# Altium PCB PCB.PcbDoc
Units mil, origin at the board's own origin, x right, y up, seen from the top; angles counter-clockwise.
Board outline 11007 x 2140 mil, 2 copper layers (Top Layer, Bottom Layer); 69 components, 106 nets, 357 pads, 118 vias.
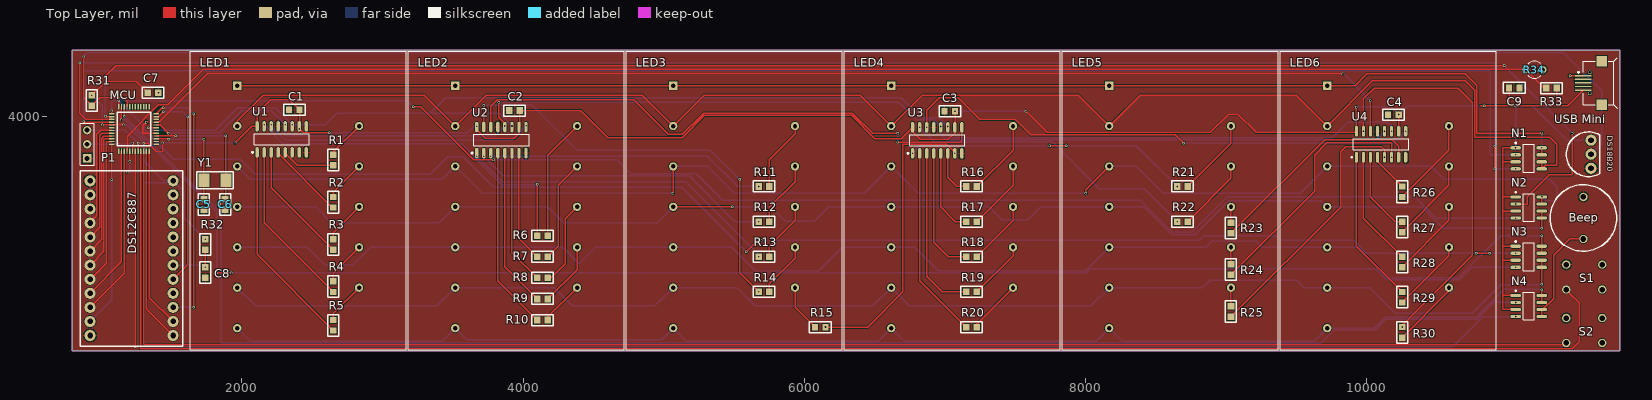
[diagram p0: Top Layer view]
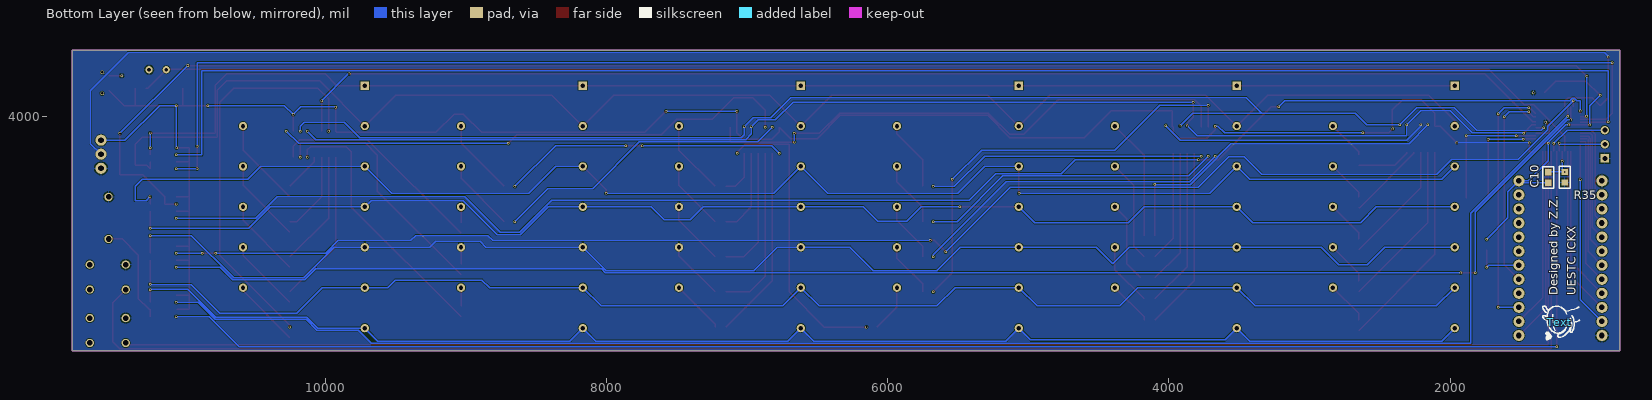
[diagram p1: Bottom Layer view, seen from below]

## Layer stack, top to bottom
Top Layer: signal copper 1.4
Dielectric: dielectric 12.6, FR-4, Dk 4.8
Bottom Layer: signal copper 1.4

## Board outline
792,4470 792,2330 11799,2330 11799,4470

## Design rules (kind name [scope] priority, off if disabled: settings)
Clearance [All] p1: gap=5
MinimumSolderMaskSliver [All] p1: minsoldermaskwidth=1
PolygonConnect [All] p1: connectstyle=Relief reliefconductorwidth=10 reliefentries=4 polygonreliefangle="90 Angle" airgapwidth=10
RoutingVias [All] p1: holewidth=11.81 width=17.81 viastyle="Through Hole" minholewidth=11.81 minwidth=17.81 maxholewidth=11.81 maxwidth=17.81
SilkscreenOverComponentPads [All] p1 off: minsilkscreentomaskgap=10
SolderMaskExpansion [All] p1: expansion=4
Width [All] p1: maxlimit=10 minlimit=10 preferedwidth=10
26 further rules are at their usual default settings.

## Components (designator, comment, footprint, x,y, rotation, side; value= is the part's Value field where it differs from the comment)
Beep "Bell" BEEP 11539,3276 r90 top
C1 "Cap" "0805 - DUPLICATE" 2410,4045 r180 top
C2 "Cap" "0805 - DUPLICATE" 3975,4040 r180 top
C3 "Cap" "0805 - DUPLICATE" 7071,4035 r180 top
C4 "Cap" "0805 - DUPLICATE" 10225,4010 r180 top
C5 "Cap" "0805 - DUPLICATE" 1730,3335 r90 top
C6 "Cap" "0805 - DUPLICATE" 1880,3335 r90 top
C7 "Cap" "0805 - DUPLICATE" 1331,4166 r0 top
C8 "Cap" "0805 - DUPLICATE" 1740,2850 r90 top
C9 "Cap" "0805 - DUPLICATE" 11010,4200 r0 top
C10 "Cap" "0805 - duplicate" 1302,3527.2 r90 bottom
DS12C887 "DS12C887" TIMER 920,3540 r0 top
DS18B20 "Header 3" TO-92 11593,3729 r90 top
LED1 "LED Matrix" "LED-MATRIX 5*7" 2400,3400 r0 top
LED2 "LED Matrix" "LED-MATRIX 5*7" 3950,3400 r0 top
LED3 "LED Matrix" "LED-MATRIX 5*7" 5500,3400 r0 top
LED4 "LED Matrix" "LED-MATRIX 5*7" 7050,3400 r0 top
LED5 "LED Matrix" "LED-MATRIX 5*7" 8600,3400 r0 top
LED6 "LED Matrix" "LED-MATRIX 5*7" 10150,3400 r0 top
MCU "STC12C5A60S2-35I-LQFP48" MCU 1370,3770 r90 top
N1 "4953" SO8_L 11150,3700 r0 top
N2 "4953" SO8_L 11150,3350 r0 top
N3 "4953" SO8_L 11150,3000 r0 top
N4 "4953" SO8_L 11150,2650 r0 top
P1 "Header 3" HDR1X3 900,3700 r90 top
R1 "Res" 0805 2650,3650 r90 top
R2 "Res" 0805 2650,3350 r90 top
R3 "Res" 0805 2650,3050 r90 top
R4 "Res" 0805 2650,2750 r90 top
R5 "Res" 0805 2650,2475 r90 top
R6 "Res" 0805 4100,3150 r0 top
R7 "Res" 0805 4100,3000 r0 top
R8 "Res" 0805 4100,2850 r0 top
R9 "Res" 0805 4100,2700 r0 top
R10 "Res" 0805 4100,2550 r0 top
R11 "Res" 0805 5675,3500 r0 top
R12 "Res" 0805 5675,3250 r0 top
R13 "Res" 0805 5675,3000 r0 top
R14 "Res" 0805 5675,2750 r0 top
R15 "Res" 0805 6150,2500 r180 top
R16 "Res" 0805 7150,3500 r0 top
R17 "Res" 0805 7150,3250 r0 top
R18 "Res" 0805 7150,3000 r0 top
R19 "Res" 0805 7150,2750 r0 top
R20 "Res" 0805 7150,2500 r0 top
R21 "Res" 0805 8650,3500 r0 top
R22 "Res" 0805 8650,3250 r0 top
R23 "Res" 0805 9033,3167 r90 top
R24 "Res" 0805 9033,2872 r90 top
R25 "Res" 0805 9033,2574 r90 top
R26 "Res" 0805 10250,3500 r270 top
R27 "Res" 0805 10250,3250 r270 top
R28 "Res" 0805 10250,3000 r270 top
R29 "Res" 0805 10250,2750 r270 top
R30 "Res" 0805 10250,2500 r270 top
R31 "4.7k" 0805 933,4073 r90 top
R32 "10K" 0805 1740,3050 r90 top
R33 "68K" 0805 11350,4200 r180 top
R34 "Res" R38 11190,4330 r90 top
R35 "Res" 0805 1185,3603 r270 bottom
S1 "SW-PB" BUTTON 11417,2767 r0 top
S2 "SW-PB" BUTTON 11417,2387 r0 top
Text "Text" TUSIJI_8 1220,2535 r90 bottom
U1 "74HC595" SO-16_L 2283,3835 r90 top
U2 "74HC595" SO-16_L 3845,3830 r90 top
U3 "74HC595" SO-16_L 6944,3828 r90 top
U4 "74HC595" SO-16_L 10100,3800 r90 top
"USB Mini" "" MICRO_USB 11754,4236 r0 top
Y1 "XTAL" 5023 1730,3545 r0 top

## Footprints (in the part's own frame and the unit in brackets; to place one, negate y for a bottom-side part, rotate by r counter-clockwise, add the part's x,y. Pads: shape width x height; smd on the part's side, far side on the other; paste and mask are expansions set on the pad)
0805 [mm]
  rect 1.14x1.2 smd: 0(0,0) 1(1.9,0)
  silkscreen extent -1,-0.99 2.9,1
"0805 - DUPLICATE" [mm]
  rect 1.14x1.2 smd: 1(0,0) 2(1.9,0)
  silkscreen extent -1,-0.99 2.9,1
"0805 - duplicate" [mm]
  rect 1.14x1.2 smd: 1(0,0) 2(1.9,0)
  silkscreen extent -1,-0.99 2.9,1
5023 [mm]
  rect 2x2.4 smd: 1(0,0) 2(4,0)
  silkscreen extent -1.32,-1.52 5.33,1.52
BEEP [mm]
  round 1.5 hole 1: 0(-3.8,0) 1(3.8,0)
  silkscreen extent -6,-6 6,6
BUTTON [mm]
  round 1.5 hole 1: 0(0,0) 1(0,4.5) 2(6.5,4.5) 3(6.5,0)
HDR1X3 [mm] "Connector; Header; 3 Position"
  rect 1.5x1.5 hole 0.9: 1(0,0)
  round 1.5 hole 0.9: 2(2.54,0) 3(5.08,0)
  silkscreen extent -1.27,-1.27 6.35,1.27
"LED-MATRIX 5*7" [mm] "LED"
  rect 1.5x1.5 hole 0.8: 1(-11,20.75)
  round 1.5 hole 0.8: 2(-11,13.45) 3(-11,6.15) 4(-11,-1.15) 5(-11,-8.45) 6(-11,-15.75) 7(-11,-23.05) 8(11,13.45) 9(11,6.15) 10(11,-1.15) 11(11,-8.45) 12(11,-15.75)
  silkscreen extent -19.5,-27 19.5,27, body extent -19.5,-27 19.5,27, height 10
MCU [mm]
  rect 1x0.25 smd: 1(-0.5,6.25) 2(-0.5,5.75) 3(-0.5,5.25) 4(-0.5,4.75) 5(-0.5,4.25) 6(-0.5,3.75) 7(-0.5,3.25) 8(-0.5,2.75) 9(-0.5,2.25) 10(-0.5,1.75) 11(-0.5,1.25) 12(-0.5,0.75) 25(7.5,0.75) 26(7.5,1.25) 27(7.5,1.75) 28(7.5,2.25) 29(7.5,2.75) 30(7.5,3.25) 31(7.5,3.75) 32(7.5,4.25) 33(7.5,4.75) 34(7.5,5.25) 35(7.5,5.75) 36(7.5,6.25)
  rect 0.25x1 smd: 13(0.75,-0.5) 14(1.25,-0.5) 15(1.75,-0.5) 16(2.25,-0.5) 17(2.75,-0.5) 18(3.25,-0.5) 19(3.75,-0.5) 20(4.25,-0.5) 21(4.75,-0.5) 22(5.25,-0.5) 23(5.75,-0.5) 24(6.25,-0.5) 37(6.25,7.5) 38(5.75,7.5) 39(5.25,7.5) 40(4.75,7.5) 41(4.25,7.5) 42(3.75,7.5) 43(3.25,7.5) 44(2.75,7.5) 45(2.25,7.5) 46(1.75,7.5) 47(1.25,7.5) 48(0.75,7.5)
  silkscreen extent 0.5,0.5 6.5,6.5
MICRO_USB [mm]
  rect 3x0.25 smd: 1(-5.508,-1.3) 2(-5.508,-0.65) 3(-5.508,0) 4(-5.508,0.65) 5(-5.508,1.3)
  round 0.635 hole 0.457 unplated: MH1(-4.3,1.9) MH2(-4.3,-1.9)
  rect 1.9x1.9 smd: ""(-2.15,-3.95) ""(-2.15,3.95)
  silkscreen extent -6.47,-4.57 0.63,4.57
R38 [mm] "Crystal, Thru-Hole; 2 Leads; Body 3.1 x 8.2 mm (Dia.xH)"
  round 1.3 hole 0.7: 1(0,1.55) 2(0,-1.55)
  silkscreen extent -1.55,-1.19 1.55,1.17
SO8_L [mm] "SOIC, 8-Leads, Body 4.9x3.9mm, Pitch 1.27mm, IPC High Density"
  oval 1.9x0.6 smd: 1(-2.35,1.905) 2(-2.35,0.635) 3(-2.35,-0.635) 4(-2.35,-1.905) 5(2.35,-1.905) 6(2.35,-0.635) 7(2.35,0.635) 8(2.35,1.905)
  silkscreen extent -2.47,-2.5 1,2.88, body extent -2,-2.5 2,2.5, height 1.75
SO-16_L [mm] "SOIC, 16-Leads, Body 9.9x3.9mm, Pitch 1.27mm, IPC High Density"
  oval 1.9x0.6 smd: 1(-2.35,4.445) 2(-2.35,3.175) 3(-2.35,1.905) 4(-2.35,0.635) 5(-2.35,-0.635) 6(-2.35,-1.905) 7(-2.35,-3.175) 8(-2.35,-4.445) 9(2.35,-4.445) 10(2.35,-3.175) 11(2.35,-1.905) 12(2.35,-0.635) 13(2.35,0.635) 14(2.35,1.905) 15(2.35,3.175) 16(2.35,4.445)
  silkscreen extent -2.47,-5 1,5.42, body extent -2,-5 2,5, height 1.75
TIMER [mm]
  round 2 hole 1: 1(0,0) 2(0,-2.54) 3(0,-5.08) 4(0,-7.62) 5(0,-10.16) 6(0,-12.7) 7(0,-15.24) 8(0,-17.78) 9(0,-20.32) 10(0,-22.86) 11(0,-25.4) 12(0,-27.94) 13(15,-27.94) 14(15,-25.4) 15(15,-22.86) 16(15,-20.32) 17(15,-17.78) 18(15,-15.24) 19(15,-12.7) 20(15,-10.16) 21(15,-7.62) 22(15,-5.08) 23(15,-2.54) 24(15,0)
  silkscreen extent -1.78,-29.84 16.76,1.78
TO-92 [mm]
  round 2 hole 1: 1(-2.54,0) 2(0,0) 3(2.54,0)
  silkscreen extent -4.04,-1.57 4.04,4.44
TUSIJI_8 [mil] "TSJ"
  silkscreen extent -128,-142 115,122

## Part data
Beep: "Electrical Bell"
C1 C2 C3 C4 C5 C6 C7 C8 C9 C10: "Capacitor"
DS18B20 P1: "Header, 3-Pin"
LED1 LED2 LED3 LED4 LED5 LED6: library part "LED-Matrix 5*7"
R31 R32 R33: library part Res
S1 S2: "Switch"
"USB Mini": library part USB
Y1: "Crystal Oscillator"

## Via types
v1: diameter 17.81, hole 11.81, Top Layer to Bottom Layer, 118 vias

## Nets (pads, with @x,y where several pads share a name; then routed paths per layer and width w, separated by ;. In a path a pad name is that pad's centre, name@x,y a point inside that pad or via, vN(x,y) a via of type N, cw(c..) or ccw(c..) an arc to the next point about the centre after c; other vN are vias at no path point)
AD: MCU.4 R33.1 R34.1 | length 10447.5
  Top Layer w10: MCU.4 1182.99,3856.99 1406,4080 1474,4080 1726,4332 R34.1@11126.98,4332 ; R34.1 11258.98,4200 R33.1
AD0: DS12C887.4 MCU.43 | length 767
  Top Layer w10: DS12C887.4 920,3241.26 969.37,3290.63 969.37,3869.37 997.95,3897.95 MCU.43
AD1: DS12C887.5 MCU.44 | length 844.2
  Top Layer w10: DS12C887.5 989.21,3209.21 989.21,3864.21 1003.27,3878.27 MCU.44
AD2: DS12C887.6 MCU.45 | length 919.8
  Top Layer w10: DS12C887.6 1004.21,3124.21 1004.21,3840.43 1011.42,3847.63 1011.42,3858.58 MCU.45
AD3: DS12C887.7 MCU.46 | length 992.8
  Top Layer w10: DS12C887.7 1019.21,3039.21 1019.21,3834.21 1023.9,3838.9 MCU.46
AD4: DS12C887.8 MCU.47 | length 1067
  Top Layer w10: DS12C887.8 1034.21,2954.21 1034.21,3819.21 MCU.47
AD5: DS12C887.9 MCU.2 | length 1102.9
  Top Layer w10: DS12C887.9 1143.62,2963.62 MCU.2
AD6: DS12C887.10 MCU.3 | length 1211.1
  Top Layer w10: DS12C887.10 1163.31,2883.31 MCU.3
AD7: DS12C887.11 MCU.48 | length 1322.5
  Top Layer w10: v1(1074.72,3549.28) MCU.48
  Bottom Layer w10: DS12C887.11 1075,2695 v1@1075,3548
AS: DS12C887.14 MCU.12 | length 1280.8
  Top Layer w10: MCU.12 1340.47,2710.08 DS12C887.14
BEEP: MCU.7 N4.4 | length 11293.4
  Top Layer w10: v1(1242.05,2361.05) MCU.7
  Bottom Layer w10: v1(1242.05,2361.05) 10610.43,2361 10824.43,2575 v1(11057.48,2575)
BEEPOUT: Beep.0 N4.5 N4.6 | length 734
  Top Layer w10: N4.5 N4.6 11248.96,2625 11327,2703.04 11327,3010 11443.39,3126.39 Beep.0
BUTTON1: MCU.9 S1.0 | length 12063.1
  Top Layer w10: MCU.9 1281.42,2345.58 11458.58,2345.58 11510,2397 11510,2674 S1.0
BUTTON2: MCU.10 S2.0 | length 11494.3
  Top Layer w10: 1301.1,2376 1301.47,2375.63 11405.63,2375.63 S2.0 ; 1301.1,2376.73 MCU.10
CS: DS12C887.13 MCU.11 | length 1388.9
  Top Layer w10: MCU.11 1320.79,2629.76 DS12C887.13
DATA: MCU.21 U4.14 | length 9073.6
  Top Layer w10: MCU.21 1394.45,3961.77 1413.51,3961.77 1751.74,4300 v1(9829,4300) ; U4.14 v1(10025,4110)
  Bottom Layer w10: v1(9829,4300) 9835,4300 v1(10025,4110)
DS: DS12C887.17 MCU.23 | length 1452.6
  Top Layer w10: MCU.23 1408.75,3996.38 1440,4027.63 v1(1440,4030) ; DS12C887.17 1614,2943.45 v1(1614,3996)
  Bottom Layer w10: v1(1440,4030) 1580,4030 v1(1614,3996)
DS18B20: DS18B20.2 MCU.33 R31.0 | length 12098.4
  Top Layer w10: v1(875,4421) 875,4131 R31.0 990,4130 1159,4130 1182.99,4106.01 MCU.33
  Bottom Layer w10: v1@873,4423 900,4450 11400,4450 11669,4181 11669,3805 DS18B20.2
GND: "USB Mini.4" "USB Mini.5" Beep.1 C1.2 C2.2 C3.2 C4.2 C5.1 C6.1 C7.2 C8.1 C9.2 DS12C887.1 DS12C887.12 DS18B20.1 MCU.17 P1.1 R34.2 R35.1 S1.1 S2.1 U1.8 U1.13 U2.8 U2.13 U3.8 U3.13 U4.8 U4.13 | length 275.4
  Top Layer w10: v1(1321,3957) 1295.73,3931.73 1295.73,3878.27 MCU.17 ; v1(11445,4287) 11445.18,4287.18 11537.15,4287.18
  other v1: 1407,4166
H1: MCU.40 N1.2 | length 11342.5
  Top Layer w10: v1@875,3957 MCU.40@1073,3957
  Bottom Layer w10: v1(875,3959) 875,4323 10875,4323 10875,3725 v1(11057.48,3725)
H1OUT: LED1.1 LED2.1 LED3.1 LED4.1 LED5.1 LED6.1 N1.7 N1.8 | length 9839.6
  Top Layer w10: LED1.1 9916.93,4216.93 10000,4300 10700,4300 10780,4220 10780,3880 v1(11243,3880) ; N1.7 v1(11242.52,3775)
  Bottom Layer w10: v1(11242.52,3775) v1@11242.52,3881
H2: MCU.39 N1.4 | length 11568.7
  Top Layer w10: v1(848,4379) 848,4019 890.31,3976.69 MCU.39 ; v1(10910,3625) v1(10910,3787)
  Bottom Layer w10: v1@847,4379 10910,4379 v1(10910,3787) ; v1(10910,3625) v1(11057.48,3625)
H2OUT: LED1.2 LED2.2 LED3.2 LED4.2 LED5.2 LED6.2 N1.5 N1.6 | length 11151.4
  Top Layer w10: LED1.2 1966.93,3966.93 2150,4150 3296.46,4150 LED2.2 3737.4,4150 4846.46,4150 LED3.2 5287.4,4150 6396.46,4150 LED4.2 6837.4,4150 7946.46,4150 LED5.2 8387.4,4150 9496.46,4150 LED6.2 10037.4,4250 10700,4250 10765,4185 10765,3850 11300,3850 11350,3800 11350,3650 11267.52,3650 N1.5 N1.6
H3: MCU.38 N2.2 | length 11796.7
  Top Layer w10: v1(1027,4284) 1103,4360 v1(10975,4360) ; v1@1036.38,3996.38 MCU.38 ; v1(11057.48,3375) 11139,3375 11139,3427 11296,3584 11458,3584 v1(11458,3877)
  Bottom Layer w10: v1(1027,4284) 1027,4003 v1(1030,4000) ; v1(10975,4360) v1(11458,3877)
H3OUT: LED1.3 LED2.3 LED3.3 LED4.3 LED5.3 LED6.3 N2.7 N2.8 | length 10544.8
  Top Layer w10: v1(5065,3451) 5066.93,3452.93 LED3.3 ; v1(8000,3450) 8000,3475.2 LED5.3 ; N2.7 N2.8@11242.52,3423.52
  Bottom Layer w10: LED1.3 2059.06,3550 3424.8,3550 LED2.3 3709.06,3450 5064,3450 v1(5065,3451) ; LED3.3 5307.87,3642.13 5500,3450 6424.8,3450 LED4.3 6809.06,3450 v1(8000,3450) ; LED5.3 8357.87,3642.13 8550,3450 9524.8,3450 LED6.3 10457.87,3642.13 10550,3550 11300,3550 11350,3500 11350,3400 11271,3400 v1(11245,3426)
H4: MCU.37 N2.4 | length 10648.2
  Top Layer w10: MCU.37 v1@1074.72,4036.28 ; v1(3218,4067) 3271.27,4067 3648.19,3690.08 v1@3787.92,3690.08
  Bottom Layer w10: v1(1074,4037) 1074,4110 1098.26,4110 1116.17,4127.91 1131.83,4127.91 1142.91,4116.83 1142.91,4111.31 1144.21,4110 3175,4110 v1(3218,4067) ; v1(3789,3689) 4667,3689 4766,3590 5231.23,3590 5418.23,3403 8387.21,3403 8616.61,3173.61 8753.61,3173.61 9006,3426 10341.21,3426 10492.21,3275 v1(11057.48,3275)
H4OUT: LED1.4 LED2.4 LED3.4 LED4.4 LED5.4 LED6.4 N2.5 N2.6 | length 10010
  Top Layer w10: LED3.4 v1(5487.72,3354.72) ; v1@11242.52,3202.52 N2.5 N2.6
  Bottom Layer w10: LED1.4 2523.28,3354.72 2637,3241 3403.21,3241 LED2.4 4175.28,3354.72 4289,3241 4953.21,3241 LED3.4 ; v1(5487.72,3354.72) 5761.28,3354.72 5862,3254 6071,3254 6171.72,3354.72 7309.72,3354.72 7402.45,3262 7589,3262 7681.72,3354.72 8414.28,3354.72 8611,3158 8774,3158 9016,3400 9671.65,3400 LED6.4 10391.28,3354.72 10544,3202 v1(11242,3202)
H5: MCU.36 N3.2 | length 10639.3
  Top Layer w10: MCU.36 v1@1123.94,4108.94 ; v1(5587,3036) 5667,3116 v1(5696,3116) ; v1(10778,3025) v1(10873,3025)
  Bottom Layer w10: v1(1124,4109) 1304,3929 1304,3904.57 1514.57,3694 1987,3694 2094,3587 3338,3587 3463,3712 3574,3712 3791,3495 5128,3495 v1(5587,3036) ; v1(5696,3116) 8808,3116 8843,3151 9354,3151 9389,3116 9905.21,3116 9996.21,3025 v1(10778,3025) ; v1(10873,3025) v1(11057.48,3025)
H5OUT: LED1.5 LED2.5 LED3.5 LED4.5 LED5.5 LED6.5 N3.7 N3.8 | length 10126.6
  Top Layer w10: N3.7@11242,3025.52 v1(11242,3150)
  Bottom Layer w10: LED1.5 2464.68,3067.32 2590,2942 2792,2942 2917.32,3067.32 LED2.5 4282.68,3067.32 4400,2950 4517.32,3067.32 LED3.5 5482.68,3067.32 5650,2900 6100,2900 6267.32,3067.32 LED4.5 6782.68,3067.32 6950,2900 7999.61,2900 LED5.5 8856.32,3067.32 8898,3109 9214,3109 9255.68,3067.32 LED6.5 9932.68,3067.32 10150,2850 10650,2850 10950,3150 v1(11242,3150)
H6: MCU.35 N3.4 | length 10791.3
  Top Layer w10: v1(1143.62,3972.62) MCU.35 ; v1@1821,2885 v1(1925,2885)
  Bottom Layer w10: v1(1143.62,3972.62) 1167.16,3972.62 1821,3318.79 v1(1821,2886) ; v1(1925,2885) 8005.82,2885 8033.82,2913 10065.79,2913 10143.79,2835 10656.21,2835 10746.21,2925 v1(11057.48,2925)
H6OUT: LED1.6 LED2.6 LED3.6 LED4.6 LED5.6 LED6.6 N3.5 N3.6 | length 10081.2
  Top Layer w10: v1(11242.52,2803.52) N3.5 N3.6
  Bottom Layer w10: LED1.6 2096.85,2650 3387.01,2650 LED2.6 4220.08,2779.92 4350,2650 4937.01,2650 LED3.6 5520.08,2779.92 5650,2650 6487.01,2650 LED4.6 6746.85,2650 8037.01,2650 LED5.6 8829.92,2779.92 8884,2834 9500.96,2834 9555.04,2779.92 10020.08,2779.92 10200,2600 10750,2600 10950,2800 11239,2800 v1(11242.52,2803.52)
H7: MCU.34 N4.2 | length 11291
  Top Layer w10: v1@1163.31,3998.31 MCU.34
  Bottom Layer w10: v1(1163,3998) 1852,3309 1852,2385 9670,2385 9762.52,2477.52 10058.73,2477.52 10135.21,2554 10782.21,2554 10903.21,2675 v1(11057.48,2675)
H7OUT: LED1.7 LED2.7 LED3.7 LED4.7 LED5.7 LED6.7 N4.7 N4.8 | length 9848.9
  Top Layer w10: N4.7 N4.8 v1(11242.52,2766.48)
  Bottom Layer w10: LED1.7 2059.45,2400 3424.41,2400 LED2.7 3600,2409.45 4983.86,2409.45 LED3.7 5159.45,2400 6524.41,2400 LED4.7 6709.45,2400 8074.41,2400 LED5.7 8259.45,2400 9624.41,2400 LED6.7 10052.52,2492.52 10129,2569 10776,2569 10977,2770 11234,2770
NetC5_2: C5.2 MCU.15 Y1.1 | length 767.1
  Top Layer w10: MCU.15 1476.1,3838.9 v1(1480,3835) ; C5.2 Y1.1 v1(1730,3835)
  Bottom Layer w10: v1(1480,3835) v1(1730,3835)
NetC6_2: C6.2 MCU.16 Y1.2 | length 939.6
  Top Layer w10: MCU.16 1390.01,3858.91 v1@1528.91,3858.91 ; C6.2@1885,3414.8 v1(1885,3860)
  Bottom Layer w10: v1(1530,3860) v1(1885,3860)
NetC8_2: C8.2 DS12C887.18 R32.0 | length 360.9
  Top Layer w10: v1(1740,2924.8) R32.0
  Bottom Layer w10: DS12C887.18 1724.8,2940 v1(1740,2924.8)
NetLED1_8: LED1.8 R1.1 | length 280.6
  Top Layer w10: R1.1 2650,3746.46 LED1.8
NetLED1_9: LED1.9 R2.1 | length 293.2
  Top Layer w10: R2.1 2650,3459.06 LED1.9
NetLED1_10: LED1.10 R3.1 | length 305.8
  Top Layer w10: R3.1 2650,3171.65 LED1.10
NetLED1_11: LED1.11 R4.1 | length 318.3
  Top Layer w10: R4.1 2650,2884.25 LED1.11
NetLED1_12: LED1.12 R5.1 | length 305.9
  Top Layer w10: R5.1 2650,2596.85 LED1.12
NetLED2_8: LED2.8 R6.1 | length 865.8
  Top Layer w10: R6.1 4174.8,3721.26 LED2.8
NetLED2_9: LED2.9 R7.1 | length 728.4
  Top Layer w10: R7.1 4250,3075.2 4250,3509.06 LED2.9
NetLED2_10: LED2.10 R8.1 | length 580.6
  Top Layer w10: 4200,2850 4300,2950 4300,3271.65 LED2.10
NetLED2_11: LED2.11 R9.1 | length 453.6
  Top Layer w10: R9.1 4383.07,2908.27 LED2.11
NetLED2_12: LED2.12 R10.1 | length 316.2
  Top Layer w10: R10.1 4174.8,2571.66 LED2.12
NetLED3_8: LED3.8 R11.1 | length 505.4
  Top Layer w10: R11.1 5749.8,3689.8 5933.07,3873.07 LED3.8
NetLED3_9: LED3.9 R12.1 | length 468
  Top Layer w10: R12.1 5749.8,3351.8 5933.07,3535.07 LED3.9
NetLED3_10: LED3.10 R13.1 | length 430.6
  Top Layer w10: R13.1 5749.8,3074.8 5933.07,3258.07 LED3.10
NetLED3_11: LED3.11 R14.1 | length 393.2
  Top Layer w10: R14.1 5749.8,2806.66 5933.07,2989.93 LED3.11
NetLED3_12: LED3.12 R15.1 | length 338.8
  Top Layer w10: LED3.12 5933.07,2642.13 R15.1
NetLED4_8: LED4.8 R16.1 | length 536.5
  Top Layer w10: R16.1 7483.07,3758.27 LED4.8
NetLED4_9: LED4.9 R17.1 | length 499.1
  Top Layer w10: R17.1 7483.07,3508.27 LED4.9
NetLED4_10: LED4.10 R18.1 | length 461.7
  Top Layer w10: R18.1 7483.07,3258.27 LED4.10
NetLED4_11: LED4.11 R19.1 | length 424.3
  Top Layer w10: R19.1 7483.07,3008.27 LED4.11
NetLED4_12: LED4.12 R20.1 | length 386.9
  Top Layer w10: R20.1 7224.8,2521.66 LED4.12
NetLED5_8: LED5.8 R21.1 | length 557.2
  Top Layer w10: R21.1 9033.07,3808.27 LED5.8
NetLED5_9: LED5.9 R22.1 | length 519.8
  Top Layer w10: R22.1 9033.07,3558.27 LED5.9
NetLED5_10: LED5.10 R23.1 | length 112.9
  Top Layer w10: R23.1 9033.07,3241.87 LED5.10
NetLED5_11: LED5.11 R24.1 | length 120.5
  Top Layer w10: R24.1 9033.07,2946.87 LED5.11
NetLED5_12: LED5.12 R25.1 | length 131
  Top Layer w10: R25.1@9033.07,2648.87 LED5.12
NetLED6_8: LED6.8 R26.1 | length 642.3
  Top Layer w10: R26.1 10583.07,3758.27 LED6.8
NetLED6_9: LED6.9 R27.1 | length 604.9
  Top Layer w10: R27.1 10583.07,3508.27 LED6.9
NetLED6_10: LED6.10 R28.1 | length 567.5
  Top Layer w10: R28.1 10583.07,3258.27 LED6.10
NetLED6_11: LED6.11 R29.1 | length 530.1
  Top Layer w10: R29.1 10583.07,3008.27 LED6.11
NetLED6_12: LED6.12 R30.1 | length 492.7
  Top Layer w10: R30.1 10583.07,2758.27 LED6.12
NetR1_0: R1.0 U1.5 | length 384.1
  Top Layer w10: U1.5 2308,3736.04 2394.04,3650 R1.0
NetR2_0: R2.0 U1.4 | length 558.3
  Top Layer w10: U1.4 2258,3736.04 2644.04,3350 R2.0
NetR3_0: R3.0 U1.3 | length 875.6
  Top Layer w10: U1.3 2208,3492 R3.0
NetR4_0: R4.0 U1.2 | length 1196.3
  Top Layer w10: U1.2 2158,3242 R4.0
NetR5_0: R5.0 U1.1 | length 1492
  Top Layer w10: U1.1 2108,3017 R5.0
NetR6_0: R6.0 U1.15 | length 2480
  Top Layer w10: R6.0 v1@4100,3511
  Bottom Layer w10: v1(2158,3939) 2292,3805 3558.79,3805 3651.09,3712.69 3651.09,3707.17 3846.37,3511.89 v1@4096.89,3511.89
  other v1: 4100,3515
NetR7_0: R7.0 U2.7 | length 791.3
  Top Layer w10: U2.7 3970,3130 R7.0
NetR8_0: R8.0 U2.6 | length 962
  Top Layer w10: U2.6 3920,3030 R8.0
NetR9_0: R9.0 U2.5 | length 1132.7
  Top Layer w10: U2.5 3870,2930 R9.0
NetR10_0: R10.0 U2.4 | length 1303.5
  Top Layer w10: U2.4 3820,2830 R10.0
NetR11_0: R11.0 U2.3 | length 1994.1
  Bottom Layer w10: v1(3770,3715) 5310,3715 5525,3500 v1(5675,3500)
NetR12_0: R12.0 U2.2 | length 2147.6
  Bottom Layer w10: v1(3720,3715) 3860,3575 5180,3575 5505,3250 v1(5675,3250)
NetR13_0: R13.0 U2.1 | length 2309.9
  Bottom Layer w10: v1(3670,3715) 3850,3535 5155,3535 5675,3015 v1(5675,3000)
NetR14_0: R14.0 U2.15 | length 3047.3
  Top Layer w10: U2.15 v1(3720,4076) ; v1(5539,3551) 5539,2886 v1(5675,2750)
  Bottom Layer w10: v1(3720,4076) 4066,4076 4383,3759 5331,3759 v1(5539,3551)
NetR15_0: R15.0 U3.7 | length 2103
  Top Layer w10: v1(6150,2500) 6450,2500 6700,2750 6700,3800 7010.92,3800 7069,3741.92 v1(7069,3735.48)
NetR16_0: R16.0 U3.6 | length 328.4
  Top Layer w10: U3.6 7019,3565 7084,3500 R16.0
NetR17_0: R17.0 U3.5 | length 605.6
  Top Layer w10: U3.5 6969,3354 7073,3250 R17.0
NetR18_0: R18.0 U3.4 | length 905.6
  Top Layer w10: U3.4 6919,3104 7023,3000 R18.0
NetR19_0: R19.0 U3.3 | length 1200.9
  Top Layer w10: U3.3 6869,2862 6981,2750 R19.0
NetR20_0: R20.0 U3.2 | length 1372.6
  Top Layer w10: U3.2 6819,2831 R20.0
NetR21_0: R21.0 U3.1 | length 2030
  Top Layer w10: v1(6769,3735.48) U3.1@6769,3741.92 ; v1(7743,3789) v1(7862,3789)
  Bottom Layer w10: v1(6769,3735.48) 6823,3789.48 v1@7743.52,3789.48 ; v1(7862,3789) 8361,3789 v1(8650,3500)
NetR22_0: R22.0 U3.15 | length 2108.7
  Bottom Layer w10: v1(6819,3920.52) 6922.52,3817 7764,3817 8096,3485 8415,3485 v1(8650,3250)
NetR23_0: R23.0 U4.7 | length 1565.9
  Top Layer w10: R23.0 9699,3833 10178,3833 10225,3786 U4.7
NetR24_0: R24.0 U4.6 | length 1778.1
  Top Layer w10: R24.0 9627,3466 9627,3723 9713,3809 10168,3809 10175,3802 v1(10175,3707.48)
NetR25_0: R25.0 U4.5 | length 1885.6
  Top Layer w10: R25.0 9812,3353 9812,3746 9849,3783 10103,3783 10125,3761 v1(10125,3707.48)
NetR26_0: R26.0 U4.4 | length 280
  Top Layer w10: U4.4 10075,3675 R26.0
NetR27_0: R27.0 U4.3 | length 580
  Top Layer w10: U4.3 10025,3425 10200,3250 R27.0
NetR28_0: R28.0 U4.2 | length 821.4
  Top Layer w10: U4.2 9975,3275 R28.0
NetR29_0: R29.0 U4.1 | length 1092.1
  Top Layer w10: U4.1 9925,3075 R29.0
NetR30_0: R30.0 U4.15 | length 2887.1
  Top Layer w10: v1(9975,3892.52) 9975,4125 10050,4200 10650,4200 10750,4100 10750,3012 10250,2512 v1(10250,2500)
NetU1_14: U1.14 U2.9 | length 1905.7
  Bottom Layer w10: v1(2208,3938) 2208,3929 2308,3829 3919,3829 v1(4021,3931)
NetU2_14: U2.14 U3.9 | length 3899.6
  Top Layer w10: U2.14 3770,4070 3815.91,4115.91 4787.09,4115.91 5033,3870 5132.79,3870 5282.79,4020 6341.21,4020 6484.21,3877 v1(6664,3877) ; v1(6664,3816) 7111,3816 7119,3824 U3.9
  Bottom Layer w10: v1(6664,3816) v1(6664,3877)
NetU3_14: U3.14 U4.9 | length 3732
  Top Layer w10: v1(6869,3920.52) 6869,4041 6958,4130 7094,4130 7246,3978 7498,3978 7610,3866 8638.1,3866 v1(8697.05,3807.05)
  Bottom Layer w10: v1(8697.05,3807.05) 10187.9,3807.05 v1(10275,3892.52)
RESET: C10.2 MCU.5 R35.0 | length 272.1
  Top Layer w10: v1(1202.68,3677.68) MCU.5
  Bottom Layer w10: v1(1202.68,3677.68) 1202.68,3620.68 v1(1185,3603) 1301,3603 C10.2
RW: DS12C887.15 MCU.24 | length 1824.4
  Top Layer w10: MCU.24 1433.62,4060 v1(1440,4060) ; v1(1657.06,2641) v1(1657.06,4016.06)
  Bottom Layer w10: v1(1440,4060) 1613.13,4060 v1(1657.06,4016.06) ; DS12C887.15 v1@1656.06,2640
RXD: MCU.6 P1.2 | length 379.8
  Top Layer w10: MCU.6 v1@1222.36,3805.64
  Bottom Layer w10: P1.2 1216,3800 v1(1222,3806)
SHCP: MCU.19 U1.11 U2.11 U3.11 U4.11 | length 9963.4
  Top Layer w10: v1@1334.64,3917.64 MCU.19
  Bottom Layer w10: v1(1334,3917) 1353,3898 1810,3898 1971,4059 2237,4059 v1(2358,3938) 2592,3938 2675,4021 3340,4021 ; v1(3920,3930) 3829,4021 3340,4021 ; v1(10175,3892.52) 10175,3929 10149,3955 9862,3955 9754,3847 7039,3847 7019,3867 v1(7019,3926) 6956,3989 6832,3989 6689,4132 3451,4132 3340,4021
STCP: MCU.20 U1.12 U2.12 U3.12 U4.12 | length 9374.3
  Top Layer w10: MCU.20 1417.68,3937.32 v1(1476,3879) ; v1(3827,4097) 3827,4100 3827,3991 3870,3948 v1(3870,3930)
  Bottom Layer w10: v1@1480,3883 1844,3883 2000,4039 2207,4039 v1(2308,3938) 2308,3859 3799,3859 v1(3870,3930) ; v1(3827,4097) 3827,4100 6672,4100 6798,3974 6921,3974 v1(6969,3926) 6969,3873 7010,3832 10064.48,3832 v1(10125,3892.52)
TXD: MCU.8 P1.3 | length 456.4
  Top Layer w10: MCU.8 v1@1261.73,3805.73
  Bottom Layer w10: P1.3 1168,3900 v1(1262,3806)
VCC: "USB Mini.1" C1.1 C2.1 C3.1 C4.1 C7.1 C9.1 C10.1 DS12C887.24 DS18B20.3 MCU.41 N1.1 N1.3 N2.1 N2.3 N3.1 N3.3 N4.1 N4.3 R31.1 R32.1 R33.0 U1.10 U1.16 U2.10 U2.16 U3.10 U3.16 U4.10 U4.16 | length 17202
  Top Layer w10: v1(933,4147.8) 1034.2,4249 1248,4249 C7.1 ; v1(1006,3937) 1006.32,3937.32 v1(1157.32,3937.32) v1@1160,3940 ; v1(1302,3808) 1334,3808 1394,3748 1438,3748 v1(1438,3809) ; v1(1951,3809) 2069.52,3927.52 U1.16 2108,4020 2206,4118 2337,4118 C1.1 2410,3929.52 U1.10 ; v1(2408,3909) 2436.88,3880.12 2467.03,3880.12 2468.92,3882 v1(2621,3882) ; U2.16 3670,3903 3732,3841 3938,3841 3970,3873 U2.10 3975,3927.52 C2.1 4409,4040 4602,3847 5131,3847 5289,4005 6335,4005 6501,3839 6687.48,3839 U3.16 6769,3888 6823,3834 7022,3834 7071,3883 v1(7071,4035) ; v1@7580,4031 7726,3885 8887,3885 9017,4015 9082,4015 9213,3884 9916.48,3884 U4.16 v1(9925,4063) ; U4.10 C4.1 ; 10807.84,4074 10806.92,4074.92 11010,4074.92 ; 10967,2725 N4.1 ; 10967,2975 N3.3 ; 10967,3425 N2.1 ; 10968,3075 N3.1 ; 10969,3325 N2.3 ; C9.1 11010,4074.92 ; N4.3@11055.48,2627 10966,2627 10966,3675 ; v1(11056,3774) 10966,3774 10966,3675 ; v1@11057,4074.92 11010,4074.92 ; v1(11057,4075) 11350,4075 ; N1.3 10966,3675 ; R33.0 11350,4075 ; 11537.15,4184.82 11427.33,4075 11350,4075
  Bottom Layer w10: v1(933,4147.8) 1006,4074.8 v1(1006,3937) ; v1(1157.32,3937.32) 1178.68,3937.32 1303,3813 1303,3682.45 1445.45,3540 DS12C887.24 ; C10.1 1497.75,3527.2 DS12C887.24 ; v1(1438,3809) v1(1951,3809) ; v1(1740,3124.8) 1589,3275.8 1589,3461.55 DS12C887.24 ; v1(2621,3882) 3604,3882 3651,3929 v1(3671,3929) ; v1(7071,4035) v1(7575,4035) ; v1@9929,4067 10171,4067 v1(10226,4012) 10288.92,4074.92 10832.08,4074.92 v1(10833,4074) ; v1@11057,3775 v1(11057,4075) 11177,4075 11423,3829 DS18B20.3
pads on no net: "USB Mini.2" "USB Mini.3" "USB Mini." "USB Mini.MH1" "USB Mini.MH2" DS12C887.2 DS12C887.3 DS12C887.16 DS12C887.19 DS12C887.20 DS12C887.21 DS12C887.22 DS12C887.23 MCU.1 MCU.13 MCU.14 MCU.18 MCU.22 MCU.25 MCU.26 MCU.27 MCU.28 MCU.29 MCU.30 MCU.31 MCU.32 MCU.42 S1.2 S1.3 S2.2 S2.3 U1.6 U1.7 U1.9

## Polygon pours and split planes (outlines as drawn)
GND on Top Layer "Bottom Solder-No Net" (solid, pour order 12): 792,4470 792,2330 11799,2330 11799,4470
GND on Bottom Layer "Bottom Solder-No Net" (solid, pour order 4): 792,4470 792,2330 11798,2330 11804,2336 11794,2346 11794,4470

## Keep-outs
Keep-Out Layer:
  the board outline again, w10

## Text inside footprints (layer, text, board x,y; h text height)
Text: Bottom Overlay "UESTC ICKX" at 1105,2725 h60 r270; Bottom Overlay "Designed by Z.Z." at 1235,2725 h60 r270